# EAGLE board TIshematic (1) (EAGLE 9.1.0)
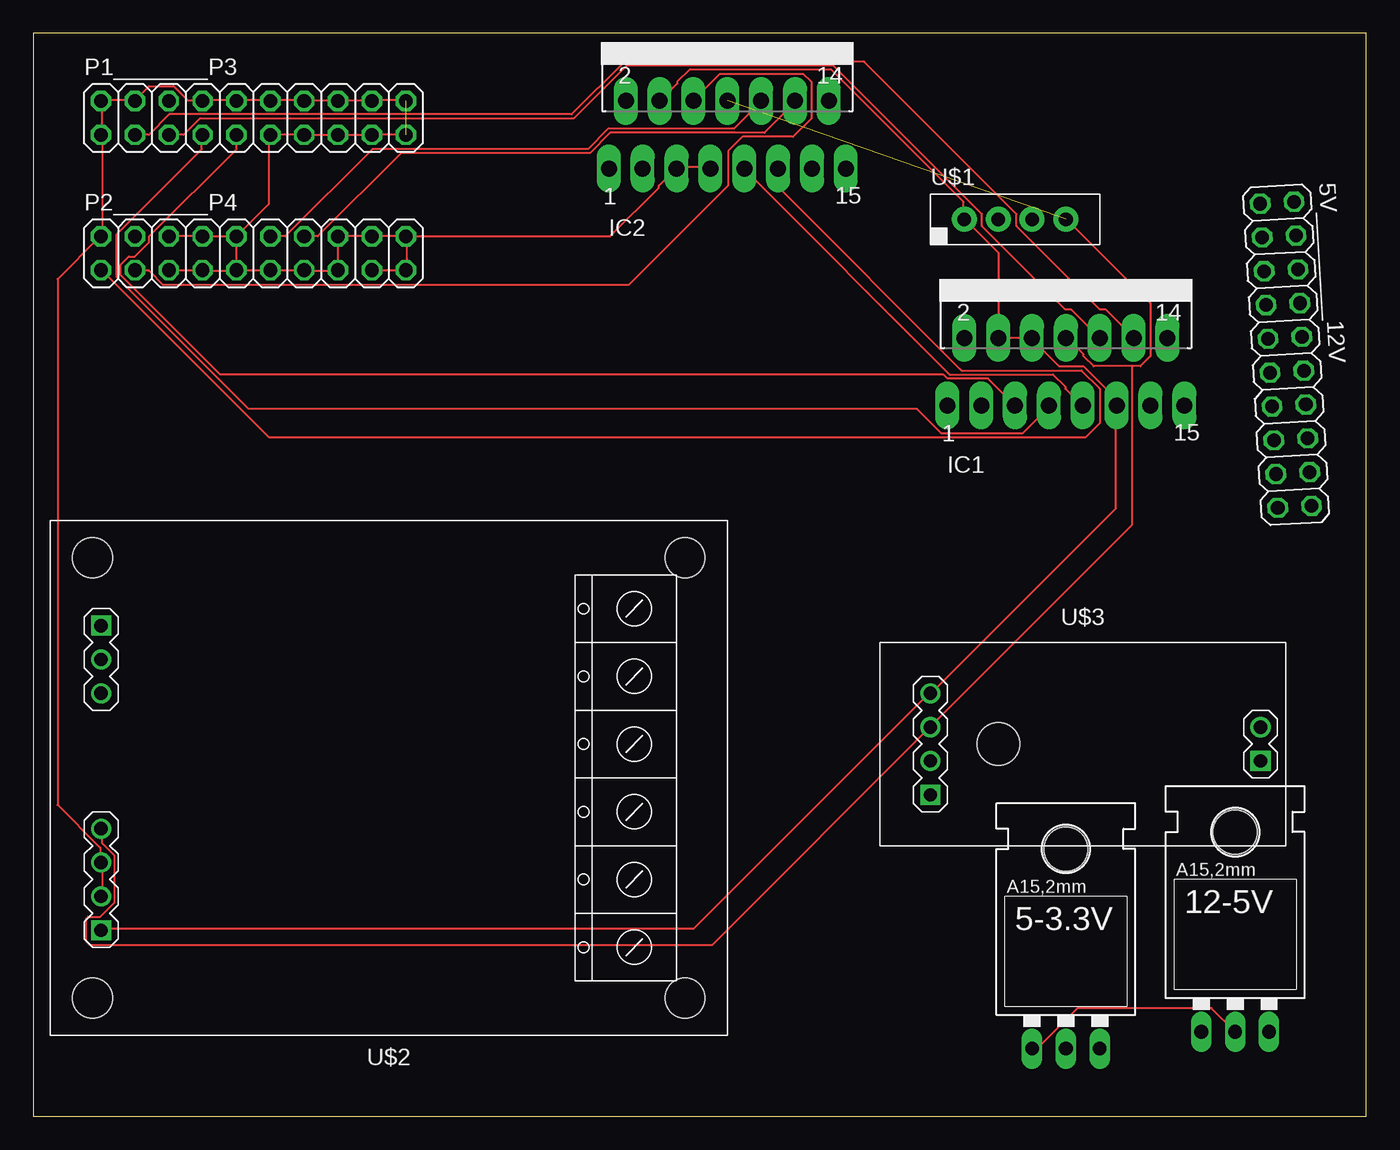
[diagram p0: board, top side]

Size 100 x 81.27 mm. Coordinates in mm from the lower left corner, seen from the top.
Outline: 0,0 100,0 100,81.27 0,81.27 0,0
Copper layers (1*16): Top 0.035mm / dielectric 1.5mm / Bottom 0.035mm
Design rules "default": minimum track width 6mil, minimum drill 0.35mm, track to track 6mil, track to pad 6mil, pad to pad 6mil, via to via 6mil, smd to smd 6mil, copper to edge 40mil, drill to drill 6mil, minimum pad ring 10mil, minimum via ring 8mil, stop-mask expansion 4mil, vias tented up to drill 0mil, thermal gap 10mil

## Footprints (pad centres in the part's own frame; a part is rotated, then mirrored left to right if it is on the bottom)
78XXL = drill 1.016 long: GND 0,-3.81; IN -2.54,-3.81; OUT 2.54,-3.81 | hole 3.302: 0,11.176
2X10 = drill 1.016 octagon: 1 -11.43,-1.27; 2 -11.43,1.27; 3 -8.89,-1.27; 4 -8.89,1.27; 5 -6.35,-1.27; 6 -6.35,1.27; 7 -3.81,-1.27; 8 -3.81,1.27; 9 -1.27,-1.27; 10 -1.27,1.27; 11 1.27,-1.27; 12 1.27,1.27; 13 3.81,-1.27; 14 3.81,1.27; 15 6.35,-1.27; 16 6.35,1.27; 17 8.89,-1.27; 18 8.89,1.27; 19 11.43,-1.27; 20 11.43,1.27
MULTIWATT-15 = drill 1.2 long: 1 -8.89,-7.62; 2 -7.62,-2.54; 3 -6.35,-7.62; 4 -5.08,-2.54; 5 -3.81,-7.62; 6 -2.54,-2.54; 7 -1.27,-7.62; 8 0,-2.54; 9 1.27,-7.62; 10 2.54,-2.54; 11 3.81,-7.62; 12 5.08,-2.54; 13 6.35,-7.62; 14 7.62,-2.54; 15 8.89,-7.62
DHT11 = drill 1.016 pad 1.88: 1 -3.81,0; 2 -1.27,0; 3 1.27,0; 4 3.81,0
RELAY-2-SRD = drill 1 square: J1.1 21.59,11.43; J2.1 21.59,-11.43 | drill 1: J1.2 21.59,8.89; J1.3 21.59,6.35; J1.4 21.59,3.81; J2.2 21.59,-8.89; J2.3 21.59,-6.35 | hole 3: -22.225,16.51; 22.225,16.51; 22.225,-16.51; -22.225,-16.51
SOIL-MOISTURE-SENSOR = drill 1 square: J1.1 -11.43,-3.81; J2.1 13.335,-1.27 | drill 1: J1.2 -11.43,-1.27; J1.3 -11.43,1.27; J1.4 -11.43,3.81; J2.2 13.335,1.27 | hole 3.2: -6.35,0

## Placement (x,y rotation side)
5-3.3V  [78XXL]  77.47,8.89 0 top
5V________12V  [2X10]  93.98,57.15 273.3 top
12-5V  [78XXL]  90.17,10.16 0 top
IC1  L298  [MULTIWATT-15]  77.47,60.96 0 top
IC2  L298  [MULTIWATT-15]  52.07,78.74 0 top
P1_______P3  [2X10]  16.51,74.93 0 top
P2_______P4  [2X10]  16.51,64.77 0 top
U$1  DHT11  [DHT11]  73.66,67.31 0 top
U$2  RELAY-2-SRD  [RELAY-2-SRD]  26.67,25.4 180 top
U$3  SOIL-MOISTURE-SENSOR  [SOIL-MOISTURE-SENSOR]  78.74,27.94 0 top

## Library data of the parts
5-3.3V 12-5V = v-reg
5V________12V P1_______P3 P2_______P4 = pinhead
IC1 IC2 = st-microelectronics; MPN: L298N; OC_FARNELL: 1589425; OC_NEWARK: 32M1527
U$1 = dht11
U$2 U$3 = diy-modules

## Nets
2: IC2.5 IC2.7 P1_______P3.1 P1_______P3.2 P1_______P3.4 P1_______P3.8 P1_______P3.10 P1_______P3.11 P1_______P3.12 P1_______P3.13 P1_______P3.14 P1_______P3.15 P1_______P3.16 P1_______P3.17 P1_______P3.18 P1_______P3.19 P1_______P3.20 P2_______P4.2 P2_______P4.5 P2_______P4.6 P2_______P4.7 P2_______P4.8 P2_______P4.9 P2_______P4.10 P2_______P4.11 P2_______P4.13 P2_______P4.15 P2_______P4.16 P2_______P4.17 P2_______P4.18 P2_______P4.19 P2_______P4.20 U$2.J1.2 U$2.J1.3
40: IC2.11 P2_______P4.1
+5V: IC1.4 IC1.6 IC1.11 IC2.4 U$1.1 U$2.J1.1 U$3.J1.4
+12V: IC1.9 IC2.9
COOL: IC1.3
DHT: P1_______P3.6
EXHST: IC2.14
GND: IC1.8 IC2.8 U$1.4 U$2.J1.4 U$3.J1.3
GND.2: U$2.J2.3
LED: IC2.3
MSEN: U$3.J1.1
N$1: P2_______P4.4
N$2: IC2.12 P2_______P4.14
N$3: U$1.2
N$4: IC2.13
N$5: IC2.2
N$6: IC1.13
N$7: IC1.12 P1_______P3.3
N$8: IC1.2
N$9: IC1.10 P1_______P3.5
N$10: IC1.7 P1_______P3.7
N$11: IC1.5 P1_______P3.9
N$12: IC2.6 P2_______P4.3
N$13: 5-3.3V.IN 12-5V.GND
N$14: IC2.10 P2_______P4.12
TEC: IC1.14
VCC.2: U$2.J2.2

## Tracks (layer width: path | path; a pad name or v marks a point on that pad's centre or on a via)
2  (1 unrouted)
  Top 0.152: P1_______P3.19 P1_______P3.17 P1_______P3.15 P1_______P3.13 P1_______P3.11 17.68,73.66 17.68,68.48 P2_______P4.10 | P2_______P4.6 P2_______P4.8 P2_______P4.10 | P2_______P4.5 10.21,63.45 12.65,63.45 P2_______P4.7 12.8,63.45 15.24,63.45 | 15.24,63.45 17.68,63.45 P2_______P4.11 17.83,63.45 20.27,63.45 P2_______P4.13 20.42,63.45 22.86,63.45 P2_______P4.15 P2_______P4.16 P2_______P4.18 P2_______P4.20 28.04,66.04 | 15.24,63.45 P2_______P4.9 P2_______P4.10 | IC2.7 50.75,71.22 48.31,71.22 IC2.5 48.16,71.07 46.94,69.85 46.94,69.7 43.28,66.04 28.04,66.04 | P2_______P4.17 25.45,63.45 27.89,63.45 P2_______P4.19 28.04,63.6 28.04,66.04 | P1_______P3.20 27.89,76.25 25.45,76.25 P1_______P3.18 25.3,76.25 22.86,76.25 | 15.24,76.25 12.8,76.25 P1_______P3.8 12.65,76.25 11.58,76.25 10.52,77.32 8.69,77.32 7.62,76.25 | 22.86,76.25 20.42,76.25 P1_______P3.14 20.27,76.25 17.83,76.25 P1_______P3.12 17.68,76.25 15.24,76.25 | 15.24,76.25 P1_______P3.10 | 22.86,76.25 P1_______P3.16 | 7.62,76.25 5.18,76.25 P1_______P3.2 5.18,76.1 5.18,73.66 | U$2.J1.2 5.18,16.51 5.18,18.95 U$2.J1.3 5.03,19.1 5.03,20.17 1.83,23.37 1.83,62.84 5.03,66.04 P2_______P4.2 5.18,66.04 5.18,73.66 | 5.18,73.66 P1_______P3.1 | 7.62,76.25 P1_______P3.4
40
  Top 0.152: P2_______P4.1 5.18,63.45 17.68,50.95 78.94,50.95 80.01,52.02 80.01,54.61 78.64,55.98 69.65,55.98 55.93,69.7 55.93,71.07 IC2.11
+5V
  Top 0.152: 74.83,58.42 IC1.4 72.39,64.82 69.95,67.26 U$1.1 69.8,67.41 69.8,68.63 59.89,78.54 49.23,78.54 48.31,77.62 48.31,77.47 47.09,76.25 IC2.4 | 74.83,58.42 76.96,56.29 78.79,56.29 81.23,53.85 81.23,53.39 IC1.11 81.23,53.24 81.23,45.62 67.36,31.75 U$3.J1.4 67.21,31.75 49.53,14.07 5.18,14.07 U$2.J1.1 | 74.83,58.42 IC1.6
+12V
  Top 0.152: IC1.9 78.64,53.39 77.42,54.61 77.42,54.76 76.5,55.68 68.73,55.68 53.34,71.07 IC2.9
GND  (1 unrouted)
  Top 0.152: 82.45,56.29 83.06,56.29 83.82,57.05 83.82,61.01 77.57,67.26 U$1.4 | 82.45,56.29 79.55,56.29 78.79,57.05 78.79,57.2 77.57,58.42 IC1.8 | U$2.J1.4 5.18,21.54 5.18,20.47 6.1,19.56 6.1,16.05 5.03,14.99 4.12,14.99 3.96,14.83 3.96,13.16 4.27,12.85 50.9,12.85 67.21,29.16 U$3.J1.3 67.36,29.31 82.45,44.4 82.45,56.29
N$2
  Top 0.152: P2_______P4.14 21.34,66.04 27.58,72.29 41.76,72.29 43.28,73.81 54.86,73.81 57.15,76.1 IC2.12
N$7
  Top 0.152: P1_______P3.3 8.69,73.66 10.21,75.18 40.39,75.18 44.35,79.15 62.33,79.15 73.76,67.72 73.76,66.8 80.01,60.55 80.47,60.55 82.6,58.42 IC1.12
N$9
  Top 0.152: P1_______P3.5 11.28,73.66 12.5,74.88 40.54,74.88 44.5,78.84 60.05,78.84 71.17,67.72 71.17,66.8 77.42,60.55 77.88,60.55 IC1.10
N$10
  Top 0.152: P1_______P3.7 12.65,73.66 12.65,72.59 6.25,66.19 6.25,62.99 16.15,53.09 66.29,53.09 68.12,51.26 74.22,51.26 76.2,53.24 IC1.7
N$11
  Top 0.152: P1_______P3.9 15.24,72.59 8.69,66.04 8.69,65.58 7.62,64.52 7.16,64.52 6.55,63.91 6.55,63.14 14.02,55.68 68.28,55.68 68.58,55.37 71.63,55.37 IC1.5
N$12
  Top 0.152: P2_______P4.3 7.62,63.45 8.69,63.45 9.75,62.38 44.65,62.38 52.12,69.85 52.12,72.44 53.19,73.51 57,73.51 58.37,74.88 58.37,77.62 57.76,78.23 51.51,78.23 49.53,76.25 IC2.6
N$13
  Top 0.152: 5-3.3V.IN 75.29,5.08 78.33,8.13 88.39,8.13 12-5V.GND
N$14
  Top 0.152: P2_______P4.12 18.9,66.04 25.45,72.59 41.6,72.59 43.13,74.12 52.58,74.12 54.56,76.1 IC2.10